# Altium PCB PCB2.PcbDoc
Units mil, origin at the board's own origin, x right, y up, seen from the top; angles counter-clockwise.
Board outline 6000 x 4000 mil, 2 copper layers (Top Layer, Bottom Layer); 35 components, 58 nets, 174 pads, 0 vias.
Unrouted connection lines stored in the file: 3.
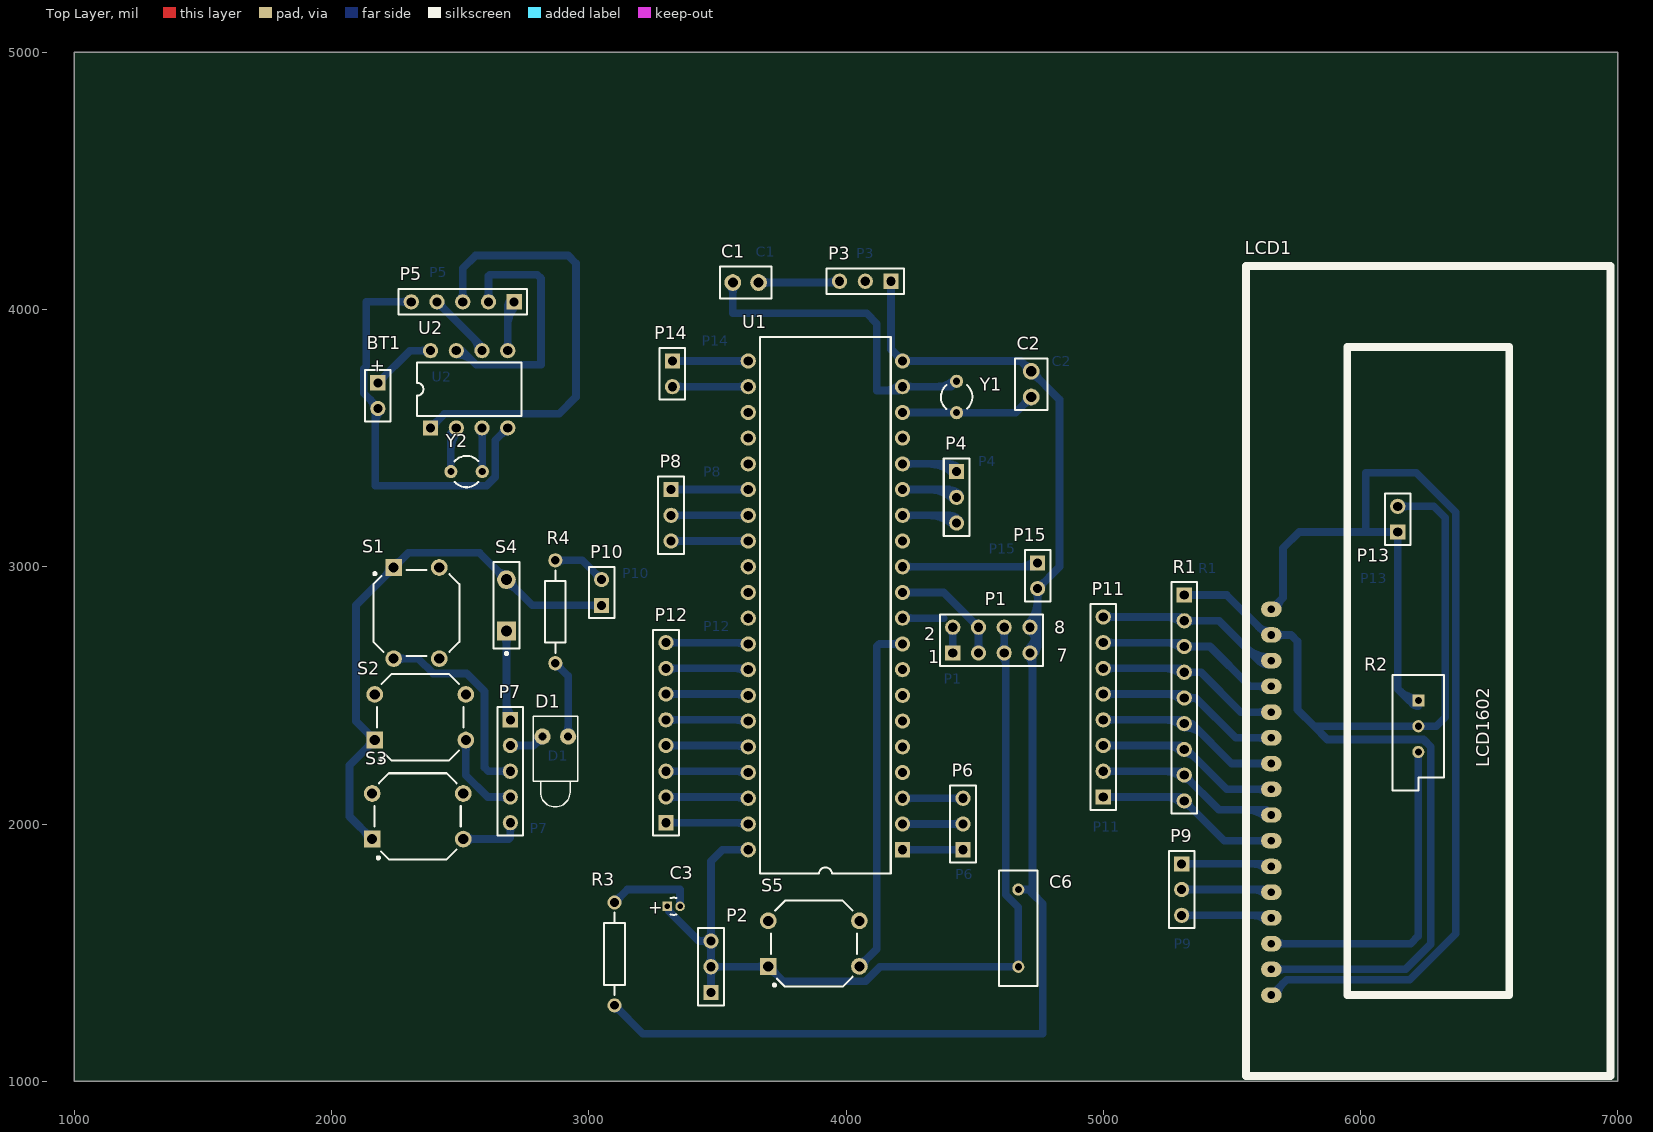
[diagram p0: Top Layer view]
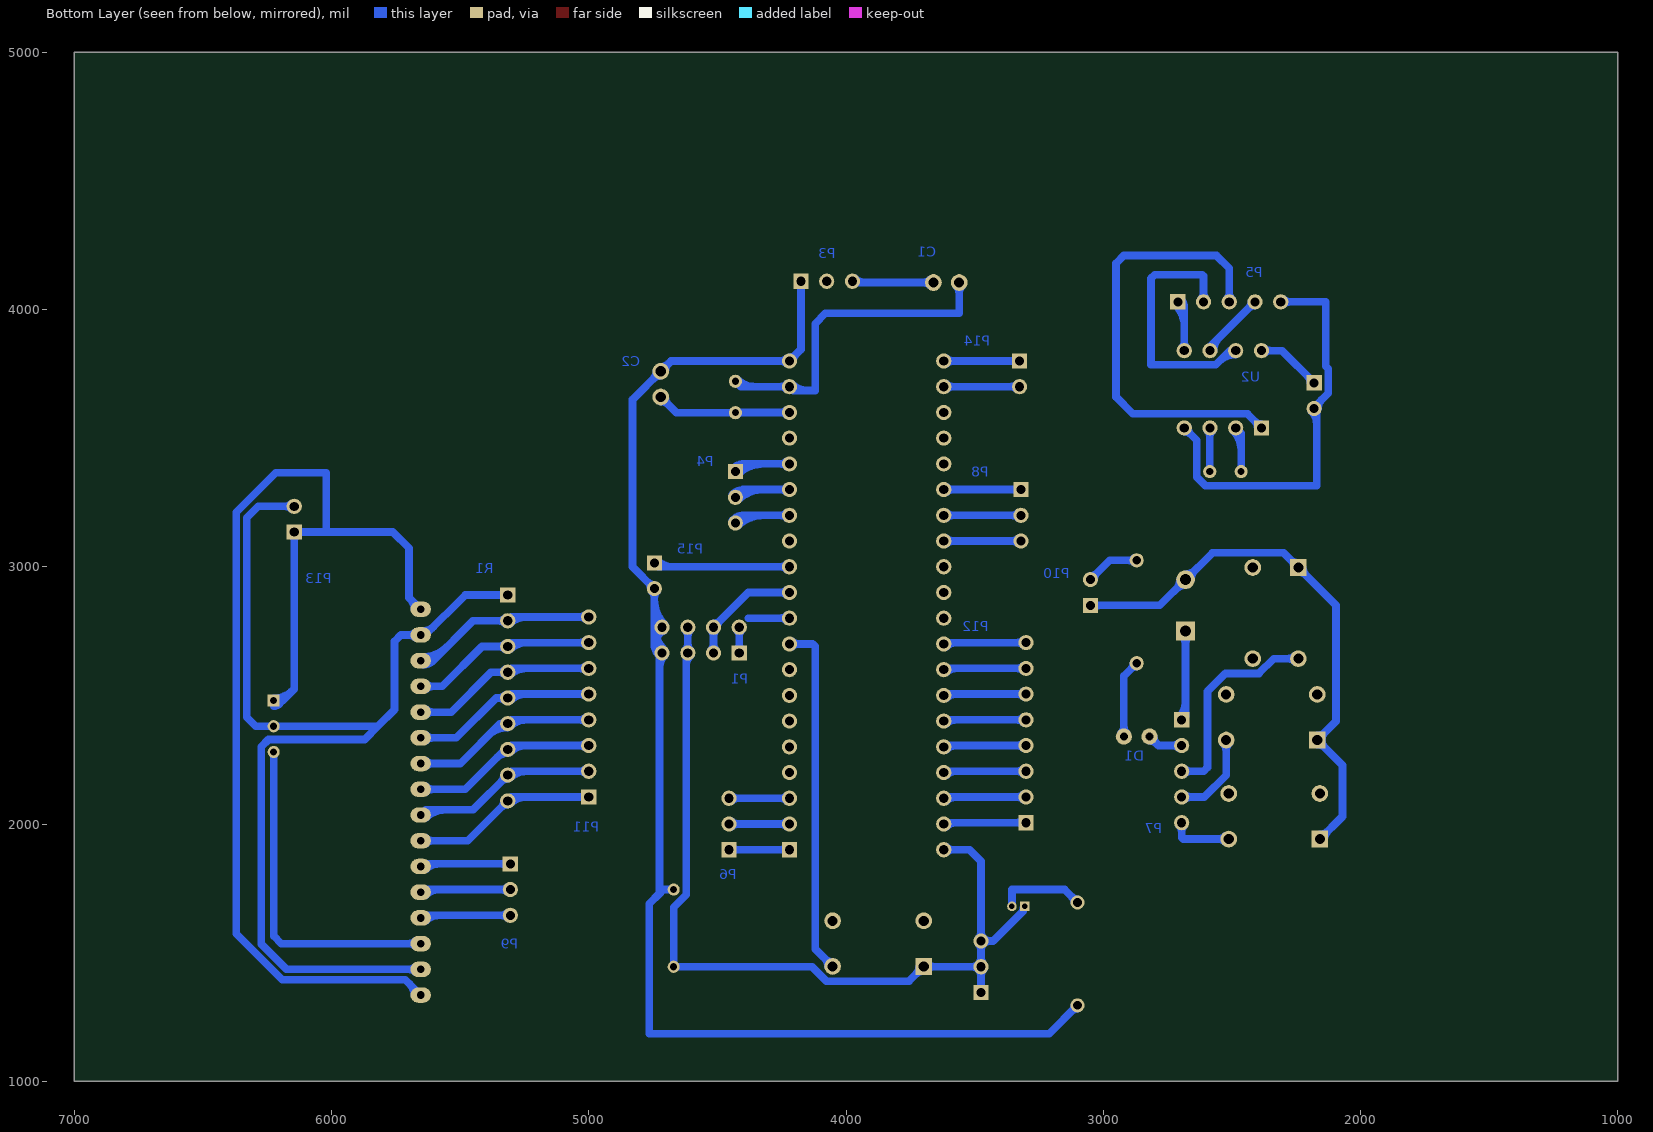
[diagram p1: Bottom Layer view, seen from below]

## Layer stack, top to bottom
Top Layer: signal copper 1.4
Dielectric: dielectric 12.6, FR-4, Dk 4.8
Bottom Layer: signal copper 1.4

## Board outline
1000,1000 7000,1000 7000,5000 1000,5000

## Design rules (kind name [scope] priority, off if disabled: settings)
Clearance [All] p1: gap=10
PolygonConnect [All] p1: connectstyle=Relief reliefconductorwidth=10 reliefentries=4 polygonreliefangle="90 Angle"
RoutingVias [All] p1: holewidth=28 width=50 viastyle="Through Hole" minholewidth=28 minwidth=50 maxholewidth=28 maxwidth=50
SilkscreenOverComponentPads [All] p1: minsilkscreentomaskgap=10
SolderMaskExpansion [All] p1: expansion=4
Width [All] p1: maxlimit=30 minlimit=30 preferedwidth=30
27 further rules are at their usual default settings.

## Components (designator, comment, footprint, x,y, rotation, side; value= is the part's Value field where it differs from the comment)
BT1 "Battery" BAT-2 2180,3665 r270 top
C1 "Cap" CAPR2.54-5.1x3.2 3610,4105 r0 top
C2 "Cap" CAPR2.54-5.1x3.2 4720,3710 r90 top
C3 "Cap Pol1" CAPPR1.27-1.7x2.8 3330,1680 r0 top
C6 "Cap" RAD-0.3 4670,1595 r90 top
D1 "LED" LED-1 2870,2340 r270 top
LCD1 "LCD1602" 1602LCD 5555,1020 r90 top
P1 "Header 4X2" HDR2X4 4415,2665 r0 top
P2 "Header 3" HDR1X3 3475,1345 r90 top
P3 "Header 3" HDR1X3 4175,4110 r180 top
P4 "Header 3" HDR1X3 4430,3370 r270 top
P5 "Header 5" HDR1X5 2710,4030 r180 top
P6 "Header 3" HDR1X3 4455,1900 r90 top
P7 "Header 5" HDR1X5 2695,2405 r270 top
P8 "Header 3" HDR1X3 3320,3300 r270 top
P9 "Header 3" HDR1X3 5305,1845 r270 top
P10 "Header 2" HDR1X2 3050,2850 r90 top
P11 "Header 8" HDR1X8 5000,2105 r90 top
P12 "Header 8" HDR1X8 3300,2005 r90 top
P13 "Header 2" HDR1X2 6145,3135 r90 top
P14 "Header 2" HDR1X2 3325,3800 r270 top
P15 "Header 2" HDR1X2 4745,3015 r270 top
R1 "res-p" HDR1X9 5315,2890 r270 top
R2 "RPot" VR5 6225,2380 r270 top
R3 "Res2" AXIAL-0.4 3100,1495 r270 top
R4 "Res2" AXIAL-0.4 2870,2825 r90 top
S1 "SW" SW/PB-V4/H7.1 2330,2820 r270 top
S2 "SW" SW/PB-V4/H7.1 2345,2415 r0 top
S3 "SW" SW/PB-V4/H7.1 2335,2030 r0 top
S4 "SW-SPST" SPST-2 2680,2850 r90 top
S5 "SW-PB" SW/PB-V4/H7.1 3875,1535 r0 top
U1 "P89C51X2BN" SOT129-1 3920,2850 r90 top
U2 "DS1302" DIP8 2535,3690 r0 top
Y1 "XTAL" BCY-W2/D3.1 4430,3660 r180 top
Y2 "XTAL" BCY-W2/D3.1 2525,3370 r270 top

## Footprints (in the part's own frame and the unit in brackets; to place one, negate y for a bottom-side part, rotate by r counter-clockwise, add the part's x,y. Pads: shape width x height; smd on the part's side, far side on the other; paste and mask are expansions set on the pad)
1602LCD [mil] "LCD mod"
  oval 60x80 hole 30: 1(314.96,-98.43) 2(414.96,-98.43) 3(514.96,-98.43) 4(614.96,-98.43) 5(714.96,-98.43) 6(814.96,-98.43) 7(914.96,-98.43) 8(1014.96,-98.43) 9(1114.96,-98.43) 10(1214.96,-98.43) 11(1314.96,-98.43) 12(1414.96,-98.43) 13(1514.96,-98.43) 14(1614.96,-98.43) 15(1714.96,-98.43) 16(1814.96,-98.43)
  silkscreen extent 0,-1417 3150,0
AXIAL-0.4 [mm] "Resis"
  round 1.4 hole 0.85: 1(-5.08,0) 2(5.08,0)
  silkscreen extent -4.06,-1.02 4.06,1.02
BAT-2 [mm] "Multicell Batt"
  rect 1.5x1.5 hole 0.9: 1(-1.27,0)
  round 1.5 hole 0.9: 2(1.27,0)
  silkscreen extent -2.54,-1.27 2.54,1.27
BCY-W2/D3.1 [mm] "Crystal, Thru-Hole; 2 Leads; Body 3.1 x 8.2"
  round 1.3 hole 0.7: 1(0,1.55) 2(0,-1.55)
  silkscreen extent -1.55,-1.19 1.55,1.17
CAPPR1.27-1.7x2.8 [mm] "Capacitor, Radial, Tantalum; Body 1.7 x 2.8 mm (Dia.xH max); Pin Spacing 1"
  rect 0.95x0.95 hole 0.55: 1(-0.635,0)
  round 0.95 hole 0.55: 2(0.635,0)
  silkscreen extent -0.29,-0.85 0.29,0.85
CAPR2.54-5.1x3.2 [mm] "Capacitor, Ceramic, Thru-Hole, Dipped Radial; Body 5.1 x 3.2 mm (WxT) Pin Spacing 2"
  round 1.65 hole 1: 1(-1.27,0) 2(1.27,0)
  silkscreen extent -2.55,-1.6 2.55,1.6
DIP8 [mm] "DIP; 8 Leads; Row Spacing 7.62 mm; P"
  rect 1.5x1.5 hole 0.9: 1(-3.81,-3.81)
  round 1.5 hole 0.9: 2(-1.27,-3.81) 3(1.27,-3.81) 4(3.81,-3.81) 5(3.81,3.81) 6(1.27,3.81) 7(-1.27,3.81) 8(-3.81,3.81)
  silkscreen extent -5.15,-2.65 5.15,2.65
HDR1X2 [mm] "Connector; Header"
  rect 1.5x1.5 hole 0.9: 1(0,0)
  round 1.5 hole 0.9: 2(2.54,0)
  silkscreen extent -1.27,-1.27 3.81,1.27
HDR1X3 [mm] "Connector; Header"
  rect 1.5x1.5 hole 0.9: 1(0,0)
  round 1.5 hole 0.9: 2(2.54,0) 3(5.08,0)
  silkscreen extent -1.27,-1.27 6.35,1.27
HDR1X5 [mm] "Connector; Header"
  rect 1.5x1.5 hole 0.9: 1(0,0)
  round 1.5 hole 0.9: 2(2.54,0) 3(5.08,0) 4(7.62,0) 5(10.16,0)
  silkscreen extent -1.27,-1.27 11.43,1.27
HDR1X8 [mm] "Connector; Header"
  rect 1.5x1.5 hole 0.9: 1(0,0)
  round 1.5 hole 0.9: 2(2.54,0) 3(5.08,0) 4(7.62,0) 5(10.16,0) 6(12.7,0) 7(15.24,0) 8(17.78,0)
  silkscreen extent -1.27,-1.27 19.05,1.27
HDR1X9 [mm]
  rect 1.5x1.5 hole 0.9: 1(0,0)
  round 1.5 hole 0.9: 2(2.54,0) 3(5.08,0) 4(7.62,0) 5(10.16,0) 6(12.7,0) 7(15.24,0) 8(17.78,0) 9(20.32,0)
  silkscreen extent -1.27,-1.27 21.59,1.27
HDR2X4 [mm] "Connector; Header;"
  rect 1.5x1.5 hole 0.9: 1(0,0)
  round 1.5 hole 0.9: 2(0,2.54) 3(2.54,0) 4(2.54,2.54) 5(5.08,0) 6(5.08,2.54) 7(7.62,0) 8(7.62,2.54)
  silkscreen extent -1.27,-1.27 8.89,3.81
LED-1 [mm]
  round 1.6 hole 0.8: 1(0,1.27) 2(0,-1.27)
  silkscreen extent -2,-2.2 6.95,2.2
RAD-0.3 [mm] "Capaci"
  round 1.2 hole 0.7: 1(-3.81,0) 2(3.81,0)
  silkscreen extent -5.71,-1.91 5.71,1.91
SOT129-1 [mm] "DIP, Plastic; 40 Leads; Row Spacing 15.24 mm; P"
  rect 1.5x1.5 hole 0.9: 1(-24.13,-7.62)
  round 1.5 hole 0.9: 2(-21.59,-7.62) 3(-19.05,-7.62) 4(-16.51,-7.62) 5(-13.97,-7.62) 6(-11.43,-7.62) 7(-8.89,-7.62) 8(-6.35,-7.62) 9(-3.81,-7.62) 10(-1.27,-7.62) 11(1.27,-7.62) 12(3.81,-7.62) 13(6.35,-7.62) 14(8.89,-7.62) 15(11.43,-7.62) 16(13.97,-7.62) 17(16.51,-7.62) 18(19.05,-7.62) 19(21.59,-7.62) 20(24.13,-7.62) 21(24.13,7.62) 22(21.59,7.62) 23(19.05,7.62) 24(16.51,7.62) 25(13.97,7.62) 26(11.43,7.62) 27(8.89,7.62) 28(6.35,7.62) 29(3.81,7.62) 30(1.27,7.62) 31(-1.27,7.62) 32(-3.81,7.62) 33(-6.35,7.62) 34(-8.89,7.62) 35(-11.43,7.62) 36(-13.97,7.62) 37(-16.51,7.62) 38(-19.05,7.62) 39(-21.59,7.62) 40(-24.13,7.62)
  silkscreen extent -26.5,-6.45 26.5,6.45
SPST-2 [mm] "Circuit Brea"
  rect 1.85x1.85 hole 1.1: 1(-2.54,0)
  round 1.85 hole 1.1: 2(2.54,0)
  silkscreen extent -4.89,-1.27 4.28,1.27
SW/PB-V4/H7.1 [mm] "Switch, Push Button, Thru-Hole; 4 Leads; Body 8.5 x 8.5 mm (LxW ty"
  rect 1.65x1.65 hole 1: 1(-4.5,-2.25)
  round 1.65 hole 1: 2(4.5,-2.25) 3(-4.5,2.25) 4(4.5,2.25)
  silkscreen extent -4.25,-4.25 4.25,4.25
VR5 [mm] "Potentiome"
  rect 1.2x1.2 hole 0.7: 1(-2.54,0)
  round 1.2 hole 0.7: 2(0,0) 3(2.54,0)
  silkscreen extent -5.08,-2.54 6.35,2.54

## Part data
BT1: "Multicell Battery"
C1 C2 C6: "Capacitor"
C3: "Polarized Capacitor (Radial)"
P1: "Header, 4-Pin, Dual row"
P2 P3 P4 P6 P8 P9: "Header, 3-Pin"
P5 P7: "Header, 5-Pin"
P10 P13 P14 P15: "Header, 2-Pin"
P11 P12: "Header, 8-Pin"
R2: "Potentiometer"
R3 R4: "Resistor"
S1 S2 S3: library part S
S4: "Single-Pole, Single-Throw Switch"
S5: "Switch"
U1: "80C51 8-Bit Flash Microcontroller Family, 4 kB Flash"
U2: "Trickle Charge Timekeeping Chip"
Y1 Y2: "Crystal Oscillator"

## Nets (pads, with @x,y where several pads share a name; then routed paths per layer and width w, separated by ;. In a path a pad name is that pad's centre, name@x,y a point inside that pad or via, vN(x,y) a via of type N, cw(c..) or ccw(c..) an arc to the next point about the centre after c; other vN are vias at no path point)
GND: C1.2 C2.2 C6.2 P1.7 P1.8 P3.1 P3.2 P3.3 P15.2 R3.2 U1.20 | length 6737.2
  Bottom Layer w30: R3.2@3100,1282.44 cw(c3100,1252.12) 3121.44,1273.56 cw(c3142.88,1295) R3.2@3112.56,1295 ; R3.2 3210,1185 4765,1185 4765,1690 4725,1730 ; C1.2 3970,4105 P3.3 ; C1.2@3672.36,4092.64 cw(c3702.2,4062.8) 3702.2,4105 cw(c3702.2,4147.2) C1.2@3672.36,4117.36 ; 3927.86,4105 ccw(c3927.86,4157.14) P3.3@3964.73,4120.27 ; P3.1@4164.73,4099.73 cw(c4139.93,4074.93) 4175,4074.93 cw(c4210.07,4074.93) P3.1@4185.27,4099.73 ; P3.1 4175,3845 U1.20 4680,3800 C2.2 4830,3650 4830,3000 P15.2 4745,2695 P1.7 4725,2655 4725,1730 ; U1.20@4205.47,3800 ccw(c4170.4,3800) 4195.2,3824.8 ccw(c4220,3849.6) U1.20@4220,3814.53 ; U1.20@4230.27,3789.73 cw(c4255.07,3764.93) 4255.07,3800 cw(c4255.07,3835.07) U1.20@4230.27,3810.27 ; C6.2 4710,1745 4725,1730 ; C2.2@4702.52,3760 ccw(c4660.32,3760) 4690.16,3789.84 ccw(c4720,3819.68) C2.2@4720,3777.48 ; P1.7@4704.73,2654.73 cw(c4655.79,2605.79) 4725,2605.79 ; P1.7@4704.73,2675.27 ccw(c4607.5,2772.5) 4745,2772.5 ; P1.8@4704.73,2775.27 ccw(c4607.5,2872.5) 4745,2872.5 ; P1.8@4707.87,2752.34 cw(c4672.14,2688.84) 4745,2688.84 ; P1.7@4715,2679.53 ccw(c4715,2714.6) 4739.8,2689.8 ccw(c4764.6,2665) P1.7@4729.53,2665 ; C2.2@4720,3742.52 cw(c4720,3700.32) 4749.84,3730.16 cw(c4779.68,3760) C2.2@4737.48,3760 ; P1.8@4722.59,2778.48 cw(c4701.02,2740.15) 4745,2740.15 ; P1.7@4725.94,2654.06 ccw(c4679.93,2700.07) 4745,2700.07 ; P1.8@4725.94,2754.06 ccw(c4679.93,2800.07) 4745,2800.07 ; P15.2@4734.73,2904.73 cw(c4709.93,2879.93) 4745,2879.93 cw(c4780.07,2879.93) P15.2@4755.27,2904.73 ; P15.2@4745,2929.53 ccw(c4745,2964.6) 4769.8,2939.8 ccw(c4794.6,2915) P15.2@4759.53,2915
MC: P15.1 U1.12 | length 654.1
  Bottom Layer w30: U1.12 4730,3000 P15.1 ; U1.12@4230.27,2989.73 cw(c4255.07,2964.93) 4255.07,3000 cw(c4255.07,3035.07) U1.12@4230.27,3010.27 ; 4673.71,3000 ccw(c4673.71,3086.29) P15.1@4734.73,3025.27
NetBT1_2: BT1.2 P5.5 U2.4 | length 1815.1
  Bottom Layer w30: 2151.25,3649.34 cw(c2116.91,3615) BT1.2@2165.47,3615 ; 2170,3555.79 cw(c2239.21,3555.79) BT1.2@2190.27,3604.73 ; P5.5@2299.73,4019.73 ccw(c2274.93,3994.93) 2274.93,4030 ccw(c2274.93,4065.07) P5.5@2299.73,4040.27 ; P5.5 2135,4030 2135,3779.06 2125.47,3769.53 2125.47,3675.12 2180,3620.59 BT1.2 2170,3605 2170,3315 2602.57,3315 2636.61,3349.04 2636.61,3491.61 U2.4 ; U2.4@2670.47,3540 cw(c2635.4,3540) 2660.2,3515.2 cw(c2685,3490.4) U2.4@2685,3525.47
NetC1_1: C1.1 U1.19 Y1.2 | length 1547.1
  Bottom Layer w30: C1.1@3547.64,4092.64 cw(c3517.8,4062.8) 3560,4062.8 cw(c3602.2,4062.8) C1.1@3572.36,4092.64 ; C1.1 3560,3985 4080,3985 4120,3945 4120,3685 4205,3685 U1.19 4408.98,3700 Y1.2 ; 4148.71,3685 ccw(c4148.71,3771.29) U1.19@4209.73,3710.27 ; U1.19@4230.27,3689.73 cw(c4255.07,3664.93) 4255.07,3700 cw(c4255.07,3735.07) U1.19@4230.27,3710.27 ; 4353.68,3700 ccw(c4353.68,3797.35) Y1.2@4422.51,3728.51
NetC2_1: C2.1 U1.18 Y1.1 | length 669.9
  Bottom Layer w30: U1.18 4428.98,3600 Y1.1 4658.98,3598.98 C2.1 ; U1.18@4230.27,3589.73 cw(c4255.07,3564.93) 4255.07,3600 cw(c4255.07,3635.07) U1.18@4230.27,3610.27 ; 4401.96,3600 cw(c4401.96,3570.94) Y1.1@4422.51,3591.49 ; C2.1@4702.52,3660 cw(c4660.32,3660) 4690.16,3630.16 cw(c4720,3600.32) C2.1@4720,3642.52
NetC3_2: C3.2 R3.1 | length 388.3
  Bottom Layer w30: R3.1 3150,1745 3355,1745 C3.2 ; R3.1@3100,1707.56 ccw(c3100,1737.88) 3121.44,1716.44 ccw(c3142.88,1695) R3.1@3112.56,1695
NetD1_1: D1.1 R4.1 | length 415.9
  Bottom Layer w30: R4.1@2870,2612.44 cw(c2870,2582.12) 2891.44,2603.56 cw(c2912.88,2625) R4.1@2882.56,2625 ; R4.1 2920,2575 D1.1 ; D1.1@2908.34,2351.66 ccw(c2880.18,2379.82) 2920,2379.82 ccw(c2959.82,2379.82) D1.1@2931.66,2351.66
NetD1_2: D1.2 P7.2 | length 257.1
  Bottom Layer w30: P7.2 2785,2305 D1.2 ; P7.2@2705.27,2294.73 cw(c2730.07,2269.93) 2730.07,2305 cw(c2730.07,2340.07) P7.2@2705.27,2315.27 ; D1.2@2803.5,2340 cw(c2763.68,2340) 2791.84,2311.84 cw(c2820,2283.68) D1.2@2820,2323.5
NetLCD1_1: LCD1.1 LCD1.16 P13.1 R2.1 | length 4849.3
  Bottom Layer w30: LCD1.1 5713.43,1394.96 6191.53,1394.96 6370,1573.43 6370,3211.57 6216.57,3365 6020,3365 6020,3140 6025,3135 ; LCD1.16 5698.46,2880 5698.46,3071.54 5761.93,3135 6025,3135 ; LCD1.1@5678.43,1334.96 cw(c5738.78,1334.96) 5696.1,1377.64 ; LCD1.16@5678.43,2834.96 cw(c5738.78,2834.96) 5696.1,2877.64 ; P13.1@6134.73,3145.27 cw(c6109.93,3170.07) 6109.93,3135 cw(c6109.93,3099.93) 6134.73,3124.73 cw(c6109.93,3099.93) 6145,3099.93 cw(c6180.07,3099.93) P13.1@6155.27,3124.73 ; 6150.53,2519.47 ccw(c6225,2593.93) R2.1@6225,2488.62 ; R2.1@6201.75,2468.25 ccw(c6225,2491.51) R2.1@6225,2458.62 ; R2.1 6190,2480 6145,2525 P13.1 6025,3135
NetLCD1_2: LCD1.2 LCD1.15 P13.2 R1.1 R2.2 | length 4557.2
  Bottom Layer w30: R1.1 5480,2890 5635.04,2734.96 LCD1.15 5730.04,2734.96 5755,2710 5755,2445 5820,2380 ; R1.1@5325.27,2879.73 cw(c5350.07,2854.93) 5350.07,2890 cw(c5350.07,2925.07) R1.1@5325.27,2900.27 ; 5603.5,2766.5 ccw(c5643.43,2806.42) LCD1.15@5643.43,2749.96 ; LCD1.2 6174.96,1434.96 6273.62,1533.62 6273.62,2300.14 6245.14,2328.62 5871.38,2328.62 5820,2380 ; LCD1.2@5674.03,1424.35 cw(c5699.64,1398.75) 5699.64,1434.96 cw(c5699.64,1471.17) LCD1.2@5674.03,1445.57 ; LCD1.15@5674.03,2724.35 cw(c5699.64,2698.75) 5699.64,2734.96 cw(c5699.64,2771.17) LCD1.15@5674.03,2745.57 ; P13.2 6285,3235 6330,3190 6330,2415 6295,2380 R2.2 5820,2380 ; P13.2@6155.27,3224.73 cw(c6180.07,3199.93) 6180.07,3235 cw(c6180.07,3270.07) P13.2@6155.27,3245.27
NetLCD1_3: LCD1.3 R2.3 | length 1355.9
  Bottom Layer w30: LCD1.3 6194.96,1534.96 6225,1565 R2.3 ; LCD1.3@5674.03,1524.35 cw(c5699.64,1498.75) 5699.64,1534.96 cw(c5699.64,1571.17) LCD1.3@5674.03,1545.57
NetLCD1_4: LCD1.4 P9.3 | length 477.2
  Bottom Layer w30: P9.3@5315.04,1634.96 P9.3 5643.39,1645 LCD1.4 ; P9.3@5315.27,1634.73 cw(c5340.07,1609.93) 5340.07,1645 cw(c5340.07,1680.07) P9.3@5315.27,1655.27 ; 5582.97,1645 cw(c5582.97,1574.51) LCD1.4@5632.82,1624.35
NetLCD1_5: LCD1.5 P9.2 | length 448.8
  Bottom Layer w30: P9.2 LCD1.5@5643.39,1745 ; P9.2@5315.27,1734.73 cw(c5340.07,1709.93) 5340.07,1745 cw(c5340.07,1780.07) P9.2@5315.27,1755.27 ; 5582.97,1745 cw(c5582.97,1674.51) LCD1.5@5632.82,1724.35
NetLCD1_6: LCD1.6 P9.1 | length 448.8
  Bottom Layer w30: P9.1 LCD1.6@5643.39,1845 ; P9.1@5315.27,1834.73 cw(c5340.07,1809.93) 5340.07,1845 cw(c5340.07,1880.07) P9.1@5315.27,1855.27 ; 5582.97,1845 cw(c5582.97,1774.51) LCD1.6@5632.82,1824.35
NetLCD1_7: LCD1.7 P11.1 R1.9 | length 937.5
  Bottom Layer w30: P11.1 R1.9@5300,2105 ; P11.1@5010.27,2094.73 cw(c5035.07,2069.93) 5035.07,2105 cw(c5035.07,2140.07) P11.1@5010.27,2115.27 ; 5243.71,2105 cw(c5243.71,2018.71) R1.9@5304.73,2079.73 ; R1.9@5315,2075.47 cw(c5315,2040.4) 5339.8,2065.2 cw(c5364.6,2090) R1.9@5329.53,2090 ; R1.9 5470.04,1934.96 LCD1.7 ; LCD1.7@5632.82,1924.35 ccw(c5607.21,1898.75) 5607.21,1934.96 ccw(c5607.21,1971.17) LCD1.7@5632.82,1945.57
NetLCD1_8: LCD1.8 P11.2 R1.8 | length 984
  Bottom Layer w30: P11.2 5300,2205 R1.8 5450,2055 5633.39,2055 LCD1.8 ; P11.2@5010.27,2194.73 cw(c5035.07,2169.93) 5035.07,2205 cw(c5035.07,2240.07) P11.2@5010.27,2215.27 ; 5243.71,2205 cw(c5243.71,2118.71) R1.8@5304.73,2179.73 ; R1.8@5315,2175.47 cw(c5315,2140.4) 5339.8,2165.2 cw(c5364.6,2190) R1.8@5329.53,2190 ; 5558.83,2055 cw(c5558.83,1950.37) LCD1.8@5632.82,2024.35
NetLCD1_9: LCD1.9 P11.3 R1.7 | length 928.9
  Bottom Layer w30: P11.3 R1.7@5300,2305 ; P11.3@5010.27,2294.73 cw(c5035.07,2269.93) 5035.07,2305 cw(c5035.07,2340.07) P11.3@5010.27,2315.27 ; 5243.71,2305 cw(c5243.71,2218.71) R1.7@5304.73,2279.73 ; R1.7@5315,2275.47 cw(c5315,2216.26) 5356.87,2258.13 ; R1.7 5325,2290 5480.04,2134.96 LCD1.9 ; LCD1.9@5632.82,2124.35 ccw(c5607.21,2098.75) 5607.21,2134.96 ccw(c5607.21,2171.17) LCD1.9@5632.82,2145.57
NetLCD1_10: LCD1.10 P11.4 R1.6 | length 1009.6
  Bottom Layer w30: P11.4 R1.6@5300,2405 ; P11.4@5010.27,2394.73 cw(c5035.07,2369.93) 5035.07,2405 cw(c5035.07,2440.07) P11.4@5010.27,2415.27 ; 5243.71,2405 cw(c5243.71,2318.71) R1.6@5304.73,2379.73 ; R1.6@5315,2375.47 cw(c5315,2267.97) 5391.01,2343.99 ; R1.6 5345,2390 ; R1.6@5326.4,2380.99 cw(c5345,2366.29) 5345,2390 ; R1.6@5326.4,2399.01 ccw(c5345,2413.71) 5345,2390 ; LCD1.10@5632.82,2224.35 ccw(c5607.21,2198.75) 5607.21,2234.96 ccw(c5607.21,2271.17) LCD1.10@5632.82,2245.57 ; LCD1.10 5500.04,2234.96 5345,2390
NetLCD1_11: LCD1.11 P11.5 R1.5 | length 937.5
  Bottom Layer w30: P11.5 R1.5@5300,2505 ; P11.5@5010.27,2494.73 cw(c5035.07,2469.93) 5035.07,2505 cw(c5035.07,2540.07) P11.5@5010.27,2515.27 ; 5243.71,2505 cw(c5243.71,2418.71) R1.5@5304.73,2479.73 ; R1.5 5360,2490 5515.04,2334.96 LCD1.11 ; R1.5@5325.27,2479.73 cw(c5350.07,2454.93) 5350.07,2490 cw(c5350.07,2525.07) R1.5@5325.27,2500.27 ; LCD1.11@5632.82,2324.35 ccw(c5607.21,2298.75) 5607.21,2334.96 ccw(c5607.21,2371.17) LCD1.11@5632.82,2345.57
NetLCD1_12: LCD1.12 P11.6 R1.4 | length 958.7
  Bottom Layer w30: P11.6 5300,2605 R1.4 5380,2590 5535.04,2434.96 LCD1.12 ; P11.6@5010.27,2594.73 cw(c5035.07,2569.93) 5035.07,2605 cw(c5035.07,2640.07) P11.6@5010.27,2615.27 ; 5243.71,2605 cw(c5243.71,2518.71) R1.4@5304.73,2579.73 ; R1.4@5325.27,2579.73 cw(c5350.07,2554.93) 5350.07,2590 cw(c5350.07,2625.07) R1.4@5325.27,2600.27 ; LCD1.12@5632.82,2424.35 ccw(c5607.21,2398.75) 5607.21,2434.96 ccw(c5607.21,2471.17) LCD1.12@5632.82,2445.57
NetLCD1_13: LCD1.13 P11.7 R1.3 | length 937.5
  Bottom Layer w30: P11.7 R1.3@5300,2705 ; P11.7@5010.27,2694.73 cw(c5035.07,2669.93) 5035.07,2705 cw(c5035.07,2740.07) P11.7@5010.27,2715.27 ; 5243.71,2705 cw(c5243.71,2618.71) R1.3@5304.73,2679.73 ; R1.3 5415,2690 5570.04,2534.96 LCD1.13 ; R1.3@5325.27,2679.73 cw(c5350.07,2654.93) 5350.07,2690 cw(c5350.07,2725.07) R1.3@5325.27,2700.27 ; LCD1.13@5632.82,2524.35 ccw(c5607.21,2498.75) 5607.21,2534.96 ccw(c5607.21,2571.17) LCD1.13@5632.82,2545.57
NetLCD1_14: LCD1.14 P11.8 R1.2 | length 1104.3
  Bottom Layer w30: P11.8 5300,2805 R1.2 5450,2790 5605.04,2634.96 LCD1.14 ; P11.8@5010.27,2794.73 cw(c5035.07,2769.93) 5035.07,2805 cw(c5035.07,2840.07) P11.8@5010.27,2815.27 ; 5243.71,2805 cw(c5243.71,2718.71) R1.2@5304.73,2779.73 ; R1.2@5325.27,2779.73 cw(c5350.07,2754.93) 5350.07,2790 cw(c5350.07,2825.07) R1.2@5325.27,2800.27 ; 5552.29,2687.71 ccw(c5643.43,2778.85) LCD1.14@5643.43,2649.96 ; 5603.5,2636.5 ccw(c5643.43,2676.42) LCD1.14@5643.43,2619.96 ; LCD1.14@5632.82,2624.35 ccw(c5607.21,2598.75) 5607.21,2634.96 ccw(c5607.21,2671.17) LCD1.14@5632.82,2645.57
NetP4_1: P4.1 U1.16 | length 491.7
  Bottom Layer w30: U1.16 4400,3400 P4.1 ; U1.16@4230.27,3389.73 cw(c4255.07,3364.93) 4255.07,3400 cw(c4255.07,3435.07) U1.16@4230.27,3410.27 ; 4322.5,3400 cw(c4322.5,3262.5) P4.1@4419.73,3359.73 ; 4394.93,3400 cw(c4394.93,3334.93) P4.1@4440.94,3380.94 ; P4.1@4415.47,3370 ccw(c4380.4,3370) 4405.2,3394.8 ccw(c4430,3419.6) P4.1@4430,3384.53
NetP4_2: P4.2 U1.15 | length 394.2
  Bottom Layer w30: U1.15 4400,3300 ; U1.15@4230.27,3289.73 cw(c4255.07,3264.93) 4255.07,3300 cw(c4255.07,3335.07) U1.15@4230.27,3310.27 ; 4322.5,3300 cw(c4322.5,3162.5) P4.2@4419.73,3259.73 ; 4394.93,3300 cw(c4394.93,3234.93) P4.2@4440.94,3280.94
NetP4_3: P4.3 U1.14 | length 491.7
  Bottom Layer w30: U1.14 4400,3200 P4.3 ; U1.14@4230.27,3189.73 cw(c4255.07,3164.93) 4255.07,3200 cw(c4255.07,3235.07) U1.14@4230.27,3210.27 ; 4322.5,3200 cw(c4322.5,3062.5) P4.3@4419.73,3159.73 ; 4394.93,3200 cw(c4394.93,3134.93) P4.3@4440.94,3180.94 ; P4.3@4415.47,3170 ccw(c4380.4,3170) 4405.2,3194.8 ccw(c4430,3219.6) P4.3@4430,3184.53
NetP5_1: P5.1 U2.5 | length 387.7
  Bottom Layer w30: U2.5@2674.73,3850.27 ccw(c2649.93,3875.07) 2685,3875.07 ccw(c2720.07,3875.07) U2.5@2695.27,3850.27 ; U2.5 2685,4005 P5.1 ; 2685,3934.57 cw(c2805.43,3934.57) P5.1@2720.27,4019.73 ; P5.1@2685,4007 cw(c2733,4007) P5.1@2699.06,4040.94
NetP5_2: P5.2 U2.7 | length 1125.8
  Bottom Layer w30: U2.7@2485,3825.47 cw(c2485,3735.15) 2548.87,3799.02 ; U2.7 2507.89,3840 2562.41,3785.47 2814.53,3785.47 2814.53,4120.47 2800,4135 2615,4135 2610,4130 P5.2 ; P5.2@2599.73,4040.27 ccw(c2574.93,4065.07) 2610,4065.07 ccw(c2645.07,4065.07) P5.2@2620.27,4040.27
NetP5_3: P5.3 U2.1 | length 1848
  Bottom Layer w30: U2.1 2439.53,3594.53 2884.53,3594.53 2950,3660 2950,4180 2920,4210 2560,4210 2510,4160 P5.3 ; U2.1@2385,3554.53 ccw(c2385,3589.6) 2409.8,3564.8 ccw(c2434.6,3540) U2.1@2399.53,3540 ; P5.3@2499.73,4040.27 ccw(c2474.93,4065.07) 2510,4065.07 ccw(c2545.07,4065.07) P5.3@2520.27,4040.27
NetP5_4: P5.4 U2.6 | length 373.6
  Bottom Layer w30: P5.4@2410,4015.47 cw(c2410,3980.4) 2434.8,4005.2 cw(c2459.6,4030) P5.4@2424.53,4030 ; P5.4 2585,3855 U2.6 ; 2549.59,3890.41 cw(c2499.19,3840) U2.6@2570.47,3840
NetP6_1: P6.1 U1.1 | length 345.2
  Bottom Layer w30: U1.1 P6.1 ; U1.1@4230.27,1889.73 cw(c4255.07,1864.93) 4255.07,1900 cw(c4255.07,1935.07) U1.1@4230.27,1910.27 ; P6.1@4444.73,1889.73 ccw(c4419.93,1864.93) 4419.93,1900 ccw(c4419.93,1935.07) P6.1@4444.73,1910.27
NetP6_2: P6.2 U1.2 | length 345.2
  Bottom Layer w30: U1.2 P6.2 ; U1.2@4230.27,1989.73 cw(c4255.07,1964.93) 4255.07,2000 cw(c4255.07,2035.07) U1.2@4230.27,2010.27 ; P6.2@4444.73,1989.73 ccw(c4419.93,1964.93) 4419.93,2000 ccw(c4419.93,2035.07) P6.2@4444.73,2010.27
NetP6_3: P6.3 U1.3 | length 345.2
  Bottom Layer w30: U1.3 P6.3 ; U1.3@4230.27,2089.73 cw(c4255.07,2064.93) 4255.07,2100 cw(c4255.07,2135.07) U1.3@4230.27,2110.27 ; P6.3@4444.73,2089.73 ccw(c4419.93,2064.93) 4419.93,2100 ccw(c4419.93,2135.07) P6.3@4444.73,2110.27
NetP7_1: P7.1 S4.1 | length 500.2
  Bottom Layer w30: S4.1@2664.86,2734.86 cw(c2628.29,2698.29) 2680,2698.29 cw(c2731.71,2698.29) S4.1@2695.14,2734.86 ; 2680,2476.29 ccw(c2766.29,2476.29) P7.1@2705.27,2415.27 ; S4.1 2680,2420 P7.1
NetP7_3: P7.3 S1.2 | length 929.1
  Bottom Layer w30: S1.2 2337.29,2642.83 2394.77,2585.35 2524.65,2585.35 2595,2515 2595,2220 2610,2205 P7.3 ; S1.2@2253.78,2630.47 cw(c2283.62,2600.63) 2283.62,2642.83 cw(c2283.62,2685.04) S1.2@2253.78,2655.2 ; P7.3@2684.73,2194.73 ccw(c2659.93,2169.93) 2659.93,2205 ccw(c2659.93,2240.07) P7.3@2684.73,2215.27
NetP7_4: P7.4 S2.2 | length 465.9
  Bottom Layer w30: S2.2@2509.8,2314.06 cw(c2479.96,2284.22) 2522.17,2284.22 cw(c2564.37,2284.22) S2.2@2534.53,2314.06 ; S2.2 2522.17,2189.87 2607.04,2105 P7.4 ; P7.4@2684.73,2094.73 ccw(c2659.93,2069.93) 2659.93,2105 ccw(c2659.93,2140.07) P7.4@2684.73,2115.27
NetP7_5: P7.5 S3.2 | length 364
  Bottom Layer w30: S3.2 2688.58,1941.42 2695,1947.83 P7.5 ; S3.2@2524.53,1929.06 cw(c2554.37,1899.22) 2554.37,1941.42 cw(c2554.37,1983.62) S3.2@2524.53,1953.78 ; P7.5@2684.73,1994.73 cw(c2659.93,1969.93) 2695,1969.93 cw(c2730.07,1969.93) P7.5@2705.27,1994.73
NetP8_1: P8.1 U1.26 | length 410.2
  Bottom Layer w30: P8.1 U1.26 ; P8.1@3330.27,3289.73 cw(c3355.07,3264.93) 3355.07,3300 cw(c3355.07,3335.07) P8.1@3330.27,3310.27 ; U1.26@3609.73,3289.73 ccw(c3584.93,3264.93) 3584.93,3300 ccw(c3584.93,3335.07) U1.26@3609.73,3310.27
NetP8_2: P8.2 U1.27 | length 410.2
  Bottom Layer w30: P8.2 U1.27 ; P8.2@3330.27,3189.73 cw(c3355.07,3164.93) 3355.07,3200 cw(c3355.07,3235.07) P8.2@3330.27,3210.27 ; U1.27@3609.73,3189.73 ccw(c3584.93,3164.93) 3584.93,3200 ccw(c3584.93,3235.07) U1.27@3609.73,3210.27
NetP8_3: P8.3 U1.28 | length 410.2
  Bottom Layer w30: P8.3 U1.28 ; P8.3@3330.27,3089.73 cw(c3355.07,3064.93) 3355.07,3100 cw(c3355.07,3135.07) P8.3@3330.27,3110.27 ; U1.28@3609.73,3089.73 ccw(c3584.93,3064.93) 3584.93,3100 ccw(c3584.93,3135.07) U1.28@3609.73,3110.27
NetP10_1: P10.1 S1.1 S2.1 S3.1 S4.2 | length 2689.9
  Bottom Layer w30: S3.1@2140.35,1941.42 ccw(c2098.15,1941.42) 2127.99,1971.26 ccw(c2157.83,2001.1) S3.1@2157.83,1958.9 ; S3.1 2070,2029.25 2070,2228.58 S2.1 2095,2399.25 2095,2850.75 S1.1 2299.25,3055 2575,3055 S4.2 2780,2850 P10.1 ; S2.1@2167.83,2308.94 ccw(c2167.83,2266.74) 2137.99,2296.58 ccw(c2108.15,2326.42) 2150.35,2326.42 ccw(c2108.15,2326.42) 2137.99,2356.26 ccw(c2167.83,2386.1) S2.1@2167.83,2343.9 ; S1.1@2223.94,2997.17 cw(c2181.74,2997.17) 2211.58,2967.32 cw(c2241.42,2937.48) S1.1@2241.42,2979.69 ; S1.1@2241.42,3014.65 ccw(c2241.42,3056.85) 2271.26,3027.01 ccw(c2301.1,2997.17) S1.1@2258.9,2997.17 ; S4.2@2658.58,2950 ccw(c2606.88,2950) 2643.44,2986.56 ccw(c2680,3023.12) S4.2@2680,2971.42 ; S4.2@2680,2928.58 cw(c2680,2876.88) 2716.56,2913.44 cw(c2753.12,2950) S4.2@2701.42,2950 ; P10.1@3039.73,2839.73 ccw(c3014.93,2814.93) 3014.93,2850 ccw(c3014.93,2885.07) P10.1@3039.73,2860.27
NetP10_2: P10.2 R4.2 | length 313.8
  Bottom Layer w30: R4.2 2975,3025 P10.2 ; R4.2@2878.88,3016.12 cw(c2900.32,2994.68) 2900.32,3025 cw(c2900.32,3055.32) R4.2@2878.88,3033.88 ; P10.2@3035.47,2950 ccw(c3000.4,2950) 3025.2,2974.8 ccw(c3050,2999.6) P10.2@3050,2964.53
NetP12_1: P12.1 U1.39 | length 418.1
  Bottom Layer w30: P12.1 3615,2005 U1.39 ; P12.1@3310.27,1994.73 cw(c3335.07,1969.93) 3335.07,2005 cw(c3335.07,2040.07) P12.1@3310.27,2015.27 ; 3572.86,2005 cw(c3572.86,1952.86) U1.39@3609.73,1989.73
NetP12_2: P12.2 U1.38 | length 411
  Bottom Layer w30: P12.2 U1.38@3615,2105 ; P12.2@3310.27,2094.73 cw(c3335.07,2069.93) 3335.07,2105 cw(c3335.07,2140.07) P12.2@3310.27,2115.27 ; 3572.86,2105 cw(c3572.86,2052.86) U1.38@3609.73,2089.73
NetP12_3: P12.3 U1.37 | length 411
  Bottom Layer w30: P12.3 U1.37@3615,2205 ; P12.3@3310.27,2194.73 cw(c3335.07,2169.93) 3335.07,2205 cw(c3335.07,2240.07) P12.3@3310.27,2215.27 ; 3572.86,2205 cw(c3572.86,2152.86) U1.37@3609.73,2189.73
NetP12_4: P12.4 U1.36 | length 411
  Bottom Layer w30: P12.4 U1.36@3615,2305 ; P12.4@3310.27,2294.73 cw(c3335.07,2269.93) 3335.07,2305 cw(c3335.07,2340.07) P12.4@3310.27,2315.27 ; 3572.86,2305 cw(c3572.86,2252.86) U1.36@3609.73,2289.73
NetP12_5: P12.5 U1.35 | length 418.1
  Bottom Layer w30: P12.5 3615,2405 U1.35 ; P12.5@3310.27,2394.73 cw(c3335.07,2369.93) 3335.07,2405 cw(c3335.07,2440.07) P12.5@3310.27,2415.27 ; 3572.86,2405 cw(c3572.86,2352.86) U1.35@3609.73,2389.73
NetP12_6: P12.6 U1.34 | length 411
  Bottom Layer w30: P12.6 U1.34@3615,2505 ; P12.6@3310.27,2494.73 cw(c3335.07,2469.93) 3335.07,2505 cw(c3335.07,2540.07) P12.6@3310.27,2515.27 ; 3572.86,2505 cw(c3572.86,2452.86) U1.34@3609.73,2489.73
NetP12_7: P12.7 U1.33 | length 411
  Bottom Layer w30: P12.7 U1.33@3615,2605 ; P12.7@3310.27,2594.73 cw(c3335.07,2569.93) 3335.07,2605 cw(c3335.07,2640.07) P12.7@3310.27,2615.27 ; 3572.86,2605 cw(c3572.86,2552.86) U1.33@3609.73,2589.73
NetP12_8: P12.8 U1.32 | length 411
  Bottom Layer w30: P12.8 U1.32@3615,2705 ; P12.8@3310.27,2694.73 cw(c3335.07,2669.93) 3335.07,2705 cw(c3335.07,2740.07) P12.8@3310.27,2715.27 ; 3572.86,2705 cw(c3572.86,2652.86) U1.32@3609.73,2689.73
NetP14_1: P14.1 U1.21 | length 405.2
  Bottom Layer w30: P14.1 U1.21 ; P14.1@3335.27,3789.73 cw(c3360.07,3764.93) 3360.07,3800 cw(c3360.07,3835.07) P14.1@3335.27,3810.27 ; U1.21@3609.73,3789.73 ccw(c3584.93,3764.93) 3584.93,3800 ccw(c3584.93,3835.07) U1.21@3609.73,3810.27
NetP14_2: P14.2 U1.22 | length 405.2
  Bottom Layer w30: P14.2 U1.22 ; P14.2@3335.27,3689.73 cw(c3360.07,3664.93) 3360.07,3700 cw(c3360.07,3735.07) P14.2@3335.27,3710.27 ; U1.22@3609.73,3689.73 ccw(c3584.93,3664.93) 3584.93,3700 ccw(c3584.93,3735.07) U1.22@3609.73,3710.27
NetS5_2: S5.2 U1.9 | length 1497.2
  Bottom Layer w30: S5.2 4120,1514.25 4120,2690 4130,2700 U1.9 ; S5.2@4052.17,1463.9 ccw(c4052.17,1506.1) 4082.01,1476.26 ccw(c4111.85,1446.42) S5.2@4069.65,1446.42 ; U1.9@4209.73,2689.73 ccw(c4184.93,2664.93) 4184.93,2700 ccw(c4184.93,2735.07) U1.9@4209.73,2710.27
NetU2_2: U2.2 Y2.2 | length 262.6
  Bottom Layer w30: Y2.2 2463.98,3518.98 U2.2 ; 2463.98,3454.17 cw(c2570.83,3454.17) U2.2@2495.27,3529.73
NetU2_3: U2.3 Y2.1 | length 225.5
  Bottom Layer w30: U2.3@2574.73,3529.73 cw(c2547.46,3502.46) 2586.02,3502.46 ; U2.3 2586.02,3538.98 Y2.1 ; 2586.02,3507.4 cw(c2617.6,3507.4) U2.3@2595.27,3529.73
RXD: P1.1 P1.2 U1.10 | length 425.3
  Bottom Layer w30: U1.10 4380,2800 ; U1.10@4230.27,2789.73 cw(c4255.07,2764.93) 4255.07,2800 cw(c4255.07,2835.07) U1.10@4230.27,2810.27 ; P1.1@4404.73,2675.27 ccw(c4379.93,2700.07) 4415,2700.07 ccw(c4450.07,2700.07) P1.1@4425.27,2675.27 ; P1.2@4404.73,2754.73 cw(c4379.93,2729.93) 4415,2729.93 cw(c4450.07,2729.93) P1.2@4425.27,2754.73 ; P1.1 P1.2
TXD: P1.3 P1.4 U1.11 | length 671.3
  Bottom Layer w30: U1.11 4380,2900 P1.4 P1.3 ; U1.11@4230.27,2889.73 cw(c4255.07,2864.93) 4255.07,2900 cw(c4255.07,2935.07) U1.11@4230.27,2910.27 ; P1.4@4500.47,2765 ccw(c4465.4,2765) 4490.2,2789.8 ccw(c4515,2814.6) P1.4@4515,2779.53 ; P1.3@4504.73,2675.27 ccw(c4479.93,2700.07) 4515,2700.07 ccw(c4550.07,2700.07) P1.3@4525.27,2675.27 ; P1.4@4504.73,2754.73 cw(c4479.93,2729.93) 4515,2729.93 cw(c4550.07,2729.93) P1.4@4525.27,2754.73
VCC: C3.1 C6.1 P1.5 P1.6 P2.1 P2.2 P2.3 S5.1 U1.40 | length 4249.4
  Bottom Layer w30: C3.1 3311.3,1673.7 3311.3,1661.9 3428.2,1545 P2.3 ; C3.1@3308.7,1680 ccw(c3346.13,1680) 3319.66,1653.53 ; P2.1@3464.73,1355.27 ccw(c3439.93,1380.07) 3475,1380.07 ccw(c3510.07,1380.07) P2.1@3485.27,1355.27 ; P2.2@3464.73,1434.73 cw(c3439.93,1409.93) 3475,1409.93 cw(c3510.07,1409.93) 3485.27,1434.73 cw(c3510.07,1409.93) 3510.07,1445 cw(c3510.07,1480.07) 3485.27,1455.27 cw(c3510.07,1480.07) 3475,1480.07 cw(c3439.93,1480.07) P2.2@3464.73,1455.27 ; P2.1 P2.2 ; P2.3@3485.27,1534.73 ccw(c3510.07,1509.93) 3475,1509.93 ccw(c3439.93,1509.93) 3464.73,1534.73 ccw(c3439.93,1509.93) 3439.93,1545 ccw(c3439.93,1580.07) 3464.73,1555.27 ccw(c3439.93,1580.07) 3475,1580.07 ccw(c3510.07,1580.07) P2.3@3485.27,1555.27 ; U1.40@3609.73,1889.73 ccw(c3584.93,1864.93) 3584.93,1900 ccw(c3584.93,1935.07) U1.40@3609.73,1910.27 ; U1.40 3520,1900 3475,1855 P2.3 ; 3652.21,1445 ccw(c3652.21,1492.04) S5.1@3685.47,1458.78 ; 3659.06,1445 cw(c3659.06,1407.64) S5.1@3685.47,1434.06 ; S5.1@3697.83,1428.94 cw(c3697.83,1386.74) 3727.68,1416.58 cw(c3757.52,1446.42) S5.1@3715.31,1446.42 ; P1.5@4604.73,2654.73 cw(c4564.53,2614.53) 4621.38,2614.53 ; P1.5@4604.73,2675.27 ccw(c4579.93,2700.07) 4615,2700.07 ccw(c4650.07,2700.07) P1.5@4625.27,2675.27 ; P1.6@4604.73,2754.73 cw(c4579.93,2729.93) 4615,2729.93 cw(c4650.07,2729.93) P1.6@4625.27,2754.73 ; P1.6 P1.5 4621.38,2658.62 4621.38,1724.86 4670,1676.24 C6.1 4132.04,1445 4075.97,1388.94 3755.31,1388.94 S5.1 3696.42,1445 P2.2 ; P2.2 P2.3
VCC1: BT1.1 U2.8 | length 367
  Bottom Layer w30: BT1.1 2305,3840 U2.8 ; BT1.1@2180,3729.53 ccw(c2180,3764.6) 2204.8,3739.8 ccw(c2229.6,3715) BT1.1@2194.53,3715 ; U2.8@2374.73,3829.73 ccw(c2349.93,3804.93) 2349.93,3840 ccw(c2349.93,3875.07) U2.8@2374.73,3850.27
pads on no net: S1.3 S1.4 S2.3 S2.4 S3.3 S3.4 S5.3 S5.4 U1.4 U1.5 U1.6 U1.7 U1.8 U1.13 U1.17 U1.23 U1.24 U1.25 U1.29 U1.30 U1.31

## Other copper
Bottom Layer:
  text "C1" at 3650,4205 h40
  text "P3" at 4040,4200 h40
  text "P5" at 2380,4125 h40
  text "P14" at 3440,3860 h40
  text "C2" at 4800,3780 h40
  text "U2" at 2390,3720 h40
  text "P4" at 4515,3390 h40
  text "P8" at 3445,3350 h40
  text "P15" at 4555,3050 h40
  text "R1" at 5370,2975 h40
  text "P10" at 3130,2955 h40
  text "P13" at 6000,2935 h40
  text "P12" at 3445,2750 h40
  text "P1" at 4380,2545 h40
  text "D1" at 2840,2245 h40
  text "P11" at 4960,1970 h40
  text "P7" at 2770,1965 h40
  text "P6" at 4425,1785 h40
  text "P9" at 5275,1515 h40

## Text inside footprints (layer, text, board x,y; h text height)
BT1: Top Overlay "+" at 2157.28,3809.49 h50 r270
C3: Top Overlay "+" at 3232.17,1650.47 h50
P1: Top Overlay "2" at 4305,2715 h50; Top Overlay "1" at 4320,2625 h50; Top Overlay "7" at 4820,2630 h50; Top Overlay "8" at 4810,2740 h50